# Altium PCB KSS.PcbDoc
Units mm, origin at the board's own origin, x right, y up, seen from the top; angles counter-clockwise.
Board outline 179 x 54.5 mm, 2 copper layers (Top Layer, Bottom Layer); 39 components, 44 nets, 172 pads, 1 vias.
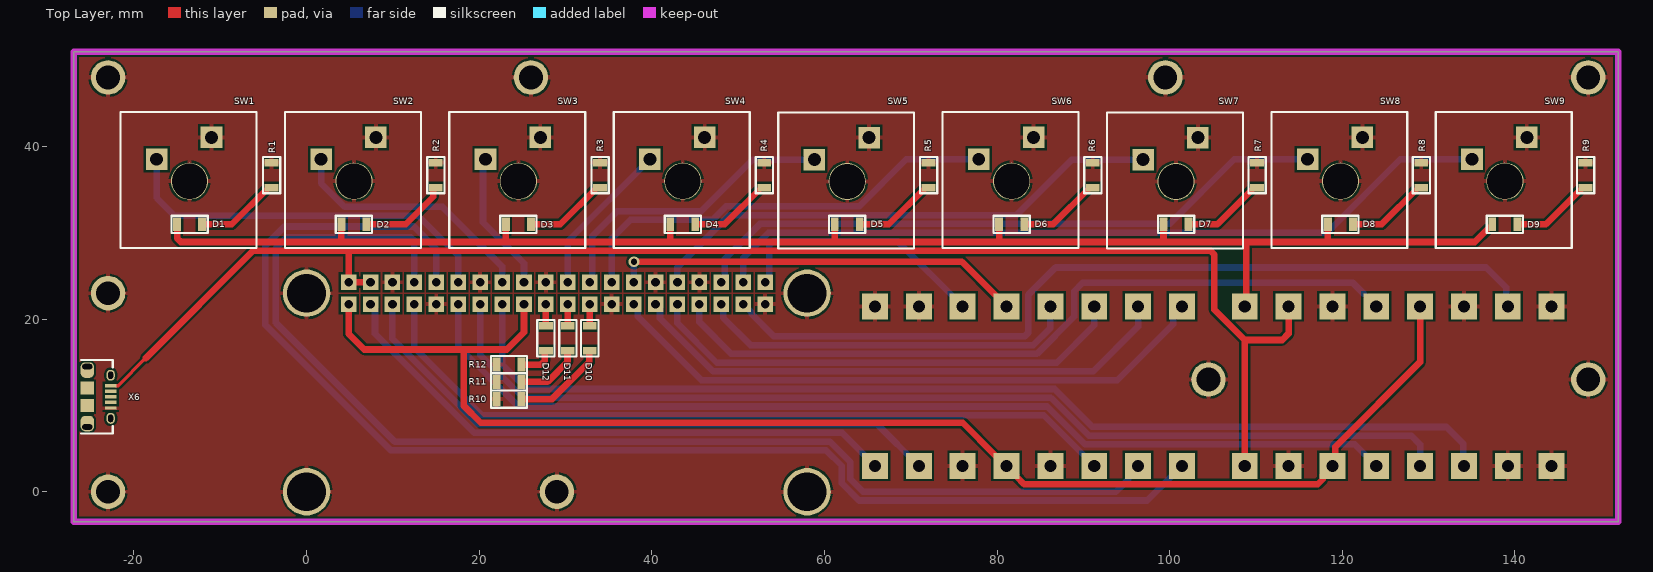
[diagram p0: Top Layer view]
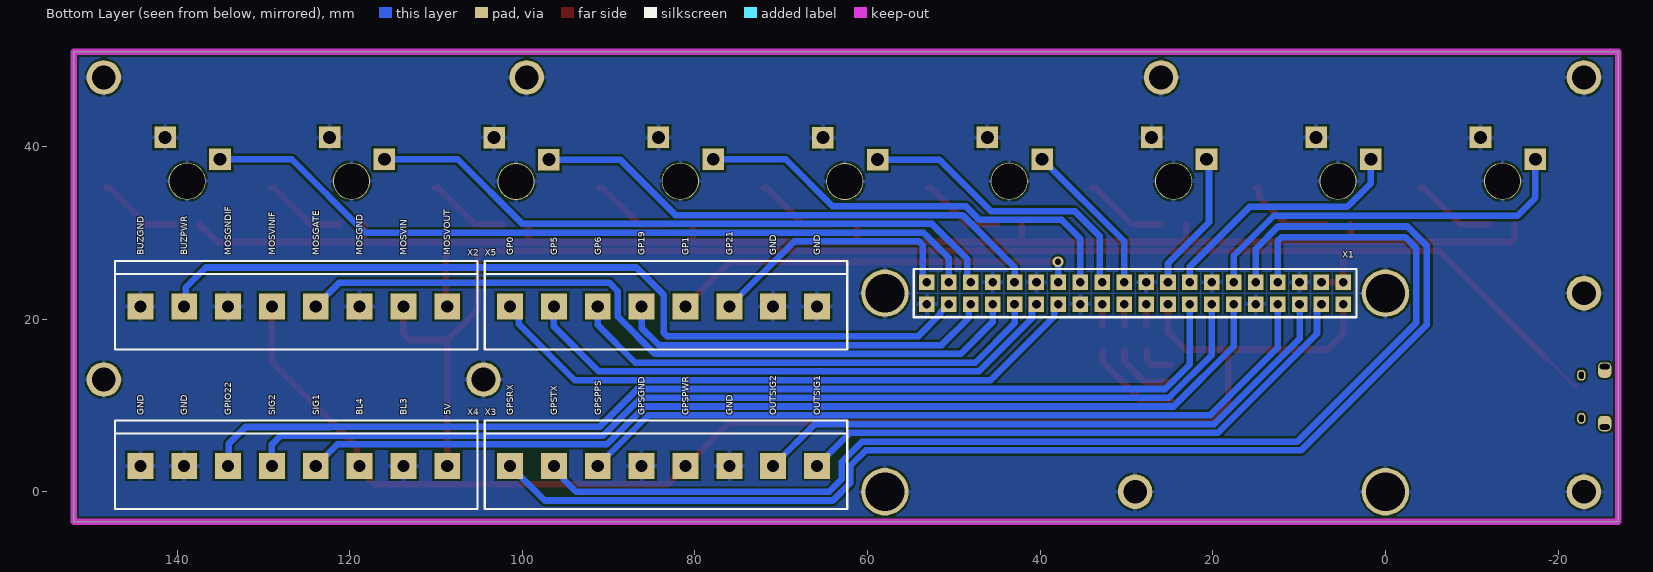
[diagram p1: Bottom Layer view, seen from below]
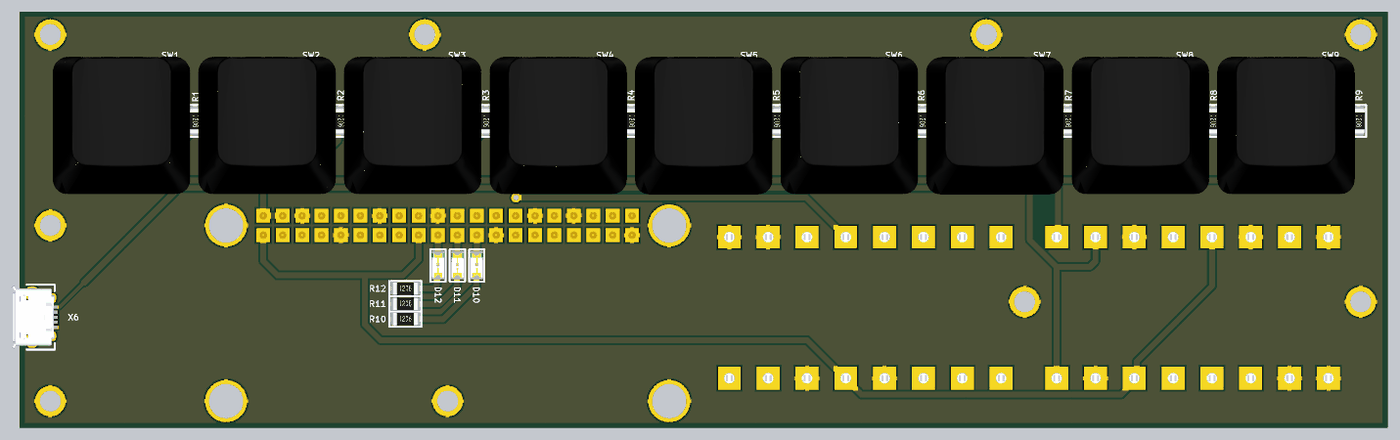
[diagram p2: 3D render of the assembled board from above, using the file's embedded part models]
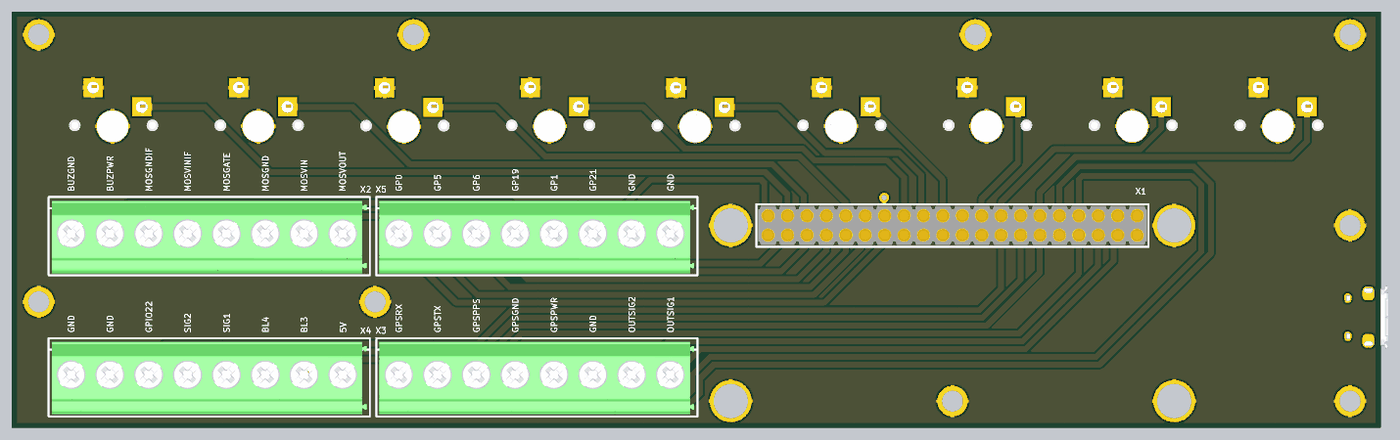
[diagram p3: 3D render of the assembled board from below, using the file's embedded part models]

## Layer stack, top to bottom
Top Solder: solder mask 0.0102, Solder Resist, Dk 3.5
Top Layer: signal copper 0.0356
Dielectric 1: dielectric 0.32, FR-4, Dk 4.8
Bottom Layer: signal copper 0.0356
Bottom Solder: solder mask 0.0102, Solder Resist, Dk 3.5

## Board outline
-27,-3.5 152,-3.5 152,51 -27,51

## Design rules (kind name [scope] priority, off if disabled: settings)
Clearance [All] p1: gap=0.254 ignorepadtopadclearanceinfootprint=FALSE except(0: Arc-Hole Track-Hole SMDPad-Hole THPad-Hole Via-Hole Fill-Hole Poly-Hole Region-Hole Text-Hole; 0.152: SMDPad-SMDPad)
ComponentClearance ComponentClearance_2 [All] p1: gap=0 collisioncheckmode=3 verticalgap=0 showdistances=FALSE
ComponentClearance ComponentClearance_1 [HasFootprint('Key switch Outemu') vs HasFootprint('LED_1206')] p2: gap=0 collisioncheckmode=3 verticalgap=0 showdistances=FALSE
ComponentClearance [All] p3: gap=0.254 collisioncheckmode=3 verticalgap=0.254 showdistances=FALSE
PlaneConnect [All] p1: planeconnectstyle=Relief reliefexpansion=0.508 reliefentries=4 reliefconductorwidth=0.508 reliefairgap=0.254
PolygonConnect [All] p1: connectstyle=Relief reliefconductorwidth=0.508 reliefentries=4 polygonreliefangle="90 Angle" airgapwidth=0.254
RoutingVias [All] p1: holewidth=0.711 width=1.27 viastyle="Through Hole" minholewidth=0.711 minwidth=1.27 maxholewidth=0.711 maxwidth=1.27
SolderMaskExpansion [All] p1: expansion=0.102 istentingtop=FALSE
Width [All] p1: maxlimit=0.762 minlimit=0.254 preferedwidth=0.254
28 further rules are at their usual default settings.

## Components (designator, comment, footprint, x,y, rotation, side; value= is the part's Value field where it differs from the comment)
D1 "?" LED_1206 -13.56,30.98 r0 top
D2 "?" LED_1206 5.49,30.98 r0 top
D3 "?" LED_1206 24.54,30.98 r0 top
D4 "?" LED_1206 43.59,30.98 r0 top
D5 "?" LED_1206 62.64,30.98 r0 top
D6 "?" LED_1206 81.69,30.98 r0 top
D7 "?" LED_1206 100.74,30.98 r0 top
D8 "?" LED_1206 119.79,30.98 r0 top
D9 "?" LED_1206 138.84,30.98 r0 top
D10 "RED" LED_1206_DLC 32.81,17.78 r270 top
D11 "YELLOW" LED_1206_DLC 30.27,17.78 r270 top
D12 "GREEN" LED_1206_DLC 27.73,17.78 r270 top
R1 "Resistor" "RES 1206" -4.06,36.68 r270 top
R2 "Resistor" "RES 1206" 14.971,36.68 r270 top
R3 "Resistor" "RES 1206" 34.002,36.68 r270 top
R4 "Resistor" "RES 1206" 53.034,36.68 r270 top
R5 "Resistor" "RES 1206" 72.065,36.68 r270 top
R6 "Resistor" "RES 1206" 91.096,36.68 r270 top
R7 "Resistor" "RES 1206" 110.127,36.68 r270 top
R8 "Resistor" "RES 1206" 129.159,36.68 r270 top
R9 "Resistor" "RES 1206" 148.19,36.68 r270 top
R10 "Resistor" "RES 1206" 23.45,10.73 r0 top
R11 "Resistor" "RES 1206" 23.45,12.73 r0 top
R12 "Resistor" "RES 1206" 23.45,14.73 r0 top
SW1 "Pushbutton" "Key switch Outemu" -13.56,35.98 r0 top
SW2 "Pushbutton" "Key switch Outemu" 5.49,35.98 r0 top
SW3 "Pushbutton" "Key switch Outemu" 24.54,35.98 r0 top
SW4 "Pushbutton" "Key switch Outemu" 43.59,35.98 r0 top
SW5 "Pushbutton" "Key switch Outemu" 62.64,35.94 r0 top
SW6 "Pushbutton" "Key switch Outemu" 81.69,35.98 r0 top
SW7 "Pushbutton" "Key switch Outemu" 100.74,35.94 r0 top
SW8 "Pushbutton" "Key switch Outemu" 119.79,35.98 r0 top
SW9 "Pushbutton" "Key switch Outemu" 138.84,35.98 r0 top
X1 "GoldPin_F_20x2" GOLDPIN_F_20x2 4.87,24.27 r0 bottom
X2 "?" "SCREW_TERMINAL_X8 5,08mm" 108.7,21.48 r0 bottom
X3 "?" "SCREW_TERMINAL_X8 5,08mm" 65.86,3 r0 bottom
X4 "?" "SCREW_TERMINAL_X8 5,08mm" 108.7,3 r0 bottom
X5 "?" "SCREW_TERMINAL_X8 5,08mm" 65.86,21.48 r0 bottom
X6 "USB_MICRO_B" USB_MICRO_B_MX-105017-0001 -22.7,11 r270 top

## Footprints (in the part's own frame and the unit in brackets; to place one, negate y for a bottom-side part, rotate by r counter-clockwise, add the part's x,y. Pads: shape width x height; smd on the part's side, far side on the other; paste and mask are expansions set on the pad)
GOLDPIN_F_20x2 [mm]
  rect 1.8x1.8 hole 1: 1(0,0) 2(0,2.54) 3(2.54,0) 4(2.54,2.54) 5(5.08,0) 6(5.08,2.54) 7(7.62,0) 8(7.62,2.54) 9(10.16,0) 10(10.16,2.54) 11(12.7,0) 12(12.7,2.54) 13(15.24,0) 14(15.24,2.54) 15(17.78,0) 16(17.78,2.54) 17(20.32,0) 18(20.32,2.54) 19(22.86,0) 20(22.86,2.54) 21(25.4,0) 22(25.4,2.54) 23(27.94,0) 24(27.94,2.54) 25(30.48,0) 26(30.48,2.54) 27(33.02,0) 28(33.02,2.54) 29(35.56,0) 30(35.56,2.54) 31(38.1,0) 32(38.1,2.54) 33(40.64,0) 34(40.64,2.54) 35(43.18,0) 36(43.18,2.54) 37(45.72,0) 38(45.72,2.54) 39(48.26,0) 40(48.26,2.54)
  silkscreen extent -1.52,-1.52 49.78,4.06, body extent -1.29,-1.28 49.51,3.8, height 7.1
"Key switch Outemu" [mm]
  rect 2.5x2.5 hole 1.5: 1(-3.81,2.54) 2(2.54,5.08)
  round 4.3 hole 4.1: MH(0,0)
  silkscreen extent -8,-7.75 7.75,8, body extent -9.13,-8.87 8.87,9.13, height 19.43
LED_1206 [mm]
  rect 0.9x1.6 smd: 1(-1.45,0) 2(1.45,0)
  silkscreen extent -2.1,-1 2.1,1, body extent -1.6,-0.8 1.6,0.8, height 0.62
LED_1206_DLC [mm]
  rect 0.9x1.6 smd: 1(-1.45,0) 2(1.45,0)
  silkscreen extent -2.1,-1 2.1,1, body extent -1.6,-0.8 1.6,0.8, height 1.8
"RES 1206" [mm]
  rect 0.9x1.6 smd: 1(-1.45,0) 2(1.45,0)
  silkscreen extent -2.1,-1 2.1,1, body extent -1.6,-0.8 1.6,0.8, height 0.58
"SCREW_TERMINAL_X8 5,08mm" [mm] "RASTER 5 mm"
  rect 3x3 hole 1.4: 1(0,0) 2(5.08,0) 3(10.16,0) 4(15.24,0) 5(20.32,0) 6(25.4,0) 7(30.48,0) 8(35.56,0)
  silkscreen extent -3.5,-5.25 38.5,5, body extent -3.1,-4.75 38.11,4.75, height 15.1
USB_MICRO_B_MX-105017-0001 [mm]
  rect 0.4x1.35 smd: 1(-1.3,0) 2(-0.65,0) 3(0,0) 4(0.65,0) 5(1.3,0)
  rrect70% 1.8x1.55 hole 0.6 slot 1.15 at 90 deg copper offset 0.4,0: MH(-3.5,-2.7)
  rrect90% 1.25x0.95 hole 0.55 slot 0.85 at 0 deg: MH(-2.5,0) MH(2.5,0)
  rrect70% 1.8x1.55 hole 0.6 slot 1.15 at 90 deg copper offset -0.4,0: MH(3.5,-2.7)
  rect 1.5x1.55 smd: MP(-1,-2.7) MP(1,-2.7)
  silkscreen extent -4.25,-3.4 4.25,0.25, body extent -4.1,-5.28 4.1,0.15, height 2.68

## Part data
D1 D2 D3 D4 D5 D6 D7 D8 D9 D10 D11 D12: library part "Diode LED"
R1 R2 R3 R4 R5 R6 R7 R8 R9 R12: Resistance=10
R10 R11: Resistance=56
X2 X3 X4 X5: library part "Connector x8"

## Free pads (board coordinates)
  round 4 hole 2.75: MH(-23,0) MH(-23,23) MH(-23,48) MH(26,48) MH(29,0) MH(99.5,48) MH(99.5,48) MH(104.5,13) MH(148.5,48) MH(148.5,13)
  round 5.5 hole 4.5: MH(0,0) MH(0,23) MH(58,0) MH(58,23)

## Via types
v1: diameter 1.27, hole 0.711, Top Layer to Bottom Layer, 1 vias

## Nets (pads, with @x,y where several pads share a name; then routed paths per layer and width w, separated by ;. In a path a pad name is that pad's centre, name@x,y a point inside that pad or via, vN(x,y) a via of type N, cw(c..) or ccw(c..) an arc to the next point about the centre after c; other vN are vias at no path point)
5V: X1.1 X1.3 X2.2 X4.1 X6.1 | length 174.6
  Top Layer w0.381: X6.1@-22.116,12.294 -21.821,12.294 -18.62,15.495
  Top Layer w0.762: -18.62,15.495 -6.202,27.914 4.87,27.914 ; X1.3 X1.1 4.87,27.914 ; X4.1 108.7,17.582 ; X2.2 113.78,18.32 113.042,17.582 108.7,17.582 ; 4.87,27.914 104.744,27.914 105.19,27.468 105.19,21.092 108.7,17.582
BUTTON_LED_3: pad.MH R1.1 R2.1 R3.1 R4.1 R5.1 R6.1 R7.1 R8.1 R9.1 R10.1 R11.1 R12.1 SW1.2 SW1.MH SW2.2 SW2.MH SW3.2 SW3.MH SW4.2 SW4.MH SW5.2 SW5.MH SW6.2 SW6.MH SW7.2 SW7.MH SW8.2 SW8.MH SW9.2 SW9.MH X1.5 X1.10 X1.13 X1.19 X1.26 X1.29 X1.33 X1.40 X2.3 X2.6 X2.8 X3.3 X3.5 X4.2 X4.7 X4.8 X5.1 X5.2 X6.5
BUTTON_LED_4: X1.2 X1.18 X2.5 X3.4 X4.3 | length 163.5
  Top Layer w0.762: X1.2 4.87,18.3 6.69,16.48 18.19,16.48 ; X1.18 25.19,18.48 23.19,16.48 18.19,16.48 ; X2.5 129.02,15.02 119.197,5.197 119.197,3.337 117.741,1.881 117.741,1.446 117.16,0.865 83.135,0.865 82.219,1.781 82.219,1.881 81.15,2.95 81.05,2.95 81.05,3.05 79.981,4.119 79.881,4.119 76.02,7.98 20.19,7.98 18.19,9.98 18.19,16.48
"BUZZER V+": X1.38 X2.7 | length 99.1
  Bottom Layer w0.762: X1.38 51.595,20.725 51.595,20.567 54.162,18 83.194,18 83.64,18.446 83.64,22.838 86.782,25.98 136.69,25.98 138.993,23.677 138.993,21.667 X2.7
GPIO0: X1.28 X5.8 | length 71.9
  Bottom Layer w0.762: X1.28 38.361,21.259 38.361,20.309 45.75,12.92 93.92,12.92 100.404,19.404 100.404,20.464 X5.8
GPIO1: X1.27 X5.4 | length 47.7
  Top Layer w0.762: v1(37.94,26.644) 75.936,26.644 X5.4
  Bottom Layer w0.762: X1.27 37.915,24.295 37.915,26.619 v1(37.94,26.644)
GPIO2: X1.4 X3.1 | length 67.9
  Bottom Layer w0.762: X1.4 7.929,21.211 7.929,18.304 19.409,6.824 62.036,6.824 X3.1
GPIO3: X1.6 X3.2 | length 71.1
  Bottom Layer w0.762: X1.6 9.95,17.72 19.83,7.84 66.1,7.84 X3.2
GPIO4: X1.8 X3.6 | length 89.5
  Bottom Layer w0.762: X1.8 12.49,16.68 20.314,8.856 85.404,8.856 X3.6
GPIO5: X1.30 X5.7 | length 64.3
  Bottom Layer w0.762: X1.30 40.949,21.211 40.949,20.1 47.113,13.936 91.146,13.936 96.34,19.13 X5.7
GPIO6: X1.32 X5.6 | length 56.4
  Bottom Layer w0.762: X1.32 42.97,19.516 47.534,14.952 86.912,14.952 91.243,19.283 91.243,21.463 X5.6
GPIO7: SW6.1 X1.25 | length 51.4
  Bottom Layer w0.762: X1.25 35.35,29.35 37.5,31.5 47.023,31.5 48.587,33.064 64.024,33.064 69.48,38.52 SW6.1
GPIO8: SW5.1 X1.23 | length 34.9
  Bottom Layer w0.762: X1.23 33.077,24.537 33.077,29.577 36.016,32.516 45.726,32.516 51.69,38.48 SW5.1
GPIO9: D11.1 X1.22 | length 2.5
  Top Layer w0.762: D11.1 X1.22
GPIO10: D12.1 X1.20 | length 2.5
  Top Layer w0.762: D12.1 X1.20
GPIO11: D10.1 X1.24 | length 2.5
  Top Layer w0.762: D10.1 X1.24
GPIO12: SW7.1 X1.31 | length 60.9
  Bottom Layer w0.762: X1.31 42.97,26.01 49.008,32.048 82.258,32.048 88.69,38.48 SW7.1
GPIO13: X1.34 X2.4 | length 88.3
  Bottom Layer w0.762: X1.34 45.51,19.66 49.202,15.968 84.615,15.968 88.94,20.293 88.94,23.23 89.94,24.23 121.19,24.23 X2.4
GPIO14: X1.7 X3.7 | length 140.8
  Bottom Layer w0.762: X1.7 12.49,29.034 12.044,29.48 -2.31,29.48 -3.56,28.23 -3.56,19.56 10.192,5.808 60.629,5.808 63.016,3.421 63.016,1.446 64.462,0 93.775,0 95.221,1.446 95.221,1.881 X3.7
GPIO15: X1.9 X3.8 | length 152.3
  Bottom Layer w0.762: X1.9 15.03,28.14 12.44,30.73 -2.56,30.73 -4.81,28.48 -4.81,19.373 9.771,4.792 60.208,4.792 62,3 62,1 64.016,-1.016 97.404,-1.016 X3.8
GPIO16: SW8.1 X1.35 | length 75.2
  Bottom Layer w0.762: X1.35 48.461,24.681 48.461,26.961 52.532,31.032 99.992,31.032 107.48,38.52 SW8.1
GPIO17: X1.12 X4.4 | length 117
  Bottom Layer w0.762: X1.12 17.57,16.85 24.548,9.872 85.825,9.872 90.213,5.484 121.456,5.484 X4.4
GPIO18: SW1.1 X1.11 | length 45.3
  Bottom Layer w0.762: SW1.1 -17.37,34.04 -15.31,31.98 12.94,31.98 17.57,27.35 X1.11
GPIO19: X1.36 X5.5 | length 44.2
  Bottom Layer w0.762: X1.36 48.287,21.493 48.287,20.133 51.436,16.984 84.194,16.984 86.18,18.97 X5.5
GPIO20: SW9.1 X1.37 | length 92
  Bottom Layer w0.762: X1.37 50.59,27.09 53.516,30.016 118.226,30.016 126.73,38.52 SW9.1
GPIO21: X1.39 X5.3 | length 30.2
  Bottom Layer w0.762: X1.39 53.604,24.744 53.604,28.554 54.05,29 68.5,29 X5.3
GPIO22: X1.16 X4.6 | length 124.7
  Bottom Layer w0.762: X1.16 22.65,14.77 25.516,11.904 86.667,11.904 91.055,7.516 122.298,7.516 122.314,7.5 132.08,7.5 134,5.58 134,3.1 X4.6
GPIO23: SW2.1 X1.15 | length 29.6
  Bottom Layer w0.762: SW2.1 1.68,35.74 4.424,32.996 15.746,32.996 22.65,26.092 X1.15
GPIO24: SW3.1 X1.17 | length 16.3
  Bottom Layer w0.762: SW3.1 20.44,38.23 20.44,31.23 25.19,26.48 X1.17
GPIO25: SW4.1 X1.21 | length 18.2
  Bottom Layer w0.762: X1.21 30.27,29.01 SW4.1
GPIO27: X1.14 X4.5 | length 121.6
  Bottom Layer w0.762: X1.14 20.11,15.873 25.095,10.888 86.246,10.888 90.634,6.5 121.877,6.5 121.893,6.484 128.016,6.484 129.02,5.48 X4.5
KEYS_LED: D1.1 D2.1 D3.1 D4.1 D5.1 D6.1 D7.1 D8.1 D9.1 X2.1 | length 177.4
  Top Layer w0.762: D1.1 -15.01,29.376 -14.564,28.93 3.94,28.93 ; D2.1 4.04,29.03 3.94,28.93 ; D3.1 23.09,29.03 23.19,28.93 ; D4.1 42.14,29.13 41.94,28.93 ; D5.1 61.19,28.93 ; D6.1 80.24,28.98 80.19,28.93 ; D7.1 99.29,28.955 99.315,28.93 ; X2.1 108.877,21.657 108.877,28.93 ; D8.1 118.34,29.03 118.44,28.93 ; D9.1 137.39,30.63 137.321,30.561 136.971,30.561 135.34,28.93 118.44,28.93 ; 3.94,28.93 23.19,28.93 ; 23.19,28.93 41.94,28.93 ; 41.94,28.93 61.19,28.93 ; 61.19,28.93 80.19,28.93 ; 80.19,28.93 99.315,28.93 ; 99.315,28.93 108.877,28.93 ; 108.877,28.93 118.44,28.93
NetD1_2: D1.2 R1.2 | length 9.8
  Top Layer w0.762: D1.2 -8.66,30.98 -4.41,35.23 R1.2
NetD2_2: D2.2 R2.2 | length 10.4
  Top Layer w0.762: D2.2 11.48,30.98 14.679,34.179 14.679,35.161 14.748,35.23 R2.2
NetD3_2: D3.2 R3.2 | length 9.8
  Top Layer w0.762: D3.2 29.402,30.98 33.652,35.23 R3.2
NetD4_2: D4.2 R4.2 | length 9.8
  Top Layer w0.762: D4.2 48.434,30.98 52.684,35.23 R4.2
NetD5_2: D5.2 R5.2 | length 9.7
  Top Layer w0.762: D5.2 67.465,30.98 71.715,35.23 R5.2
NetD6_2: D6.2 R6.2 | length 9.7
  Top Layer w0.762: D6.2 86.496,30.98 90.746,35.23 R6.2
NetD7_2: D7.2 R7.2 | length 9.7
  Top Layer w0.762: D7.2 105.527,30.98 109.777,35.23 R7.2
NetD8_2: D8.2 R8.2 | length 9.7
  Top Layer w0.762: D8.2 124.559,30.98 128.809,35.23 R8.2
NetD9_2: D9.2 R9.2 | length 9.7
  Top Layer w0.762: D9.2 143.59,30.98 147.84,35.23 R9.2
NetD10_2: D10.2 R10.2 | length 10.9
  Top Layer w0.762: R10.2 28.44,10.73 32.77,15.06 D10.2@32.77,16.33
NetD11_2: D11.2 R11.2 | length 7.6
  Top Layer w0.762: R11.2 27.9,12.73 30.23,15.06 D11.2@30.23,16.33
NetD12_2: D12.2 R12.2 | length 4.1
  Top Layer w0.762: R12.2 27.15,14.73 27.596,15.176 27.596,16.261 27.665,16.33 D12.2@27.69,16.33
pads on no net: X6.2 X6.3 X6.4 X6.MH X6.MP

## Polygon pours and split planes (outlines as drawn)
BUTTON_LED_3 on Bottom Layer "GND" (solid, remove dead copper, pour order 0): -27,51 -27,-3.5 152,-3.5 152,51
BUTTON_LED_3 on Top Layer "GND" (solid, remove dead copper, pour order 1): -27,51 -27,-3.5 152,-3.5 152,51

## Keep-outs
Keep-Out Layer:
  the board outline again, w0.762

## Silkscreen, mask and mechanical layers (free items; w line width, h text height)
Bottom Overlay:
  text "GND" at 65.479,27.377 h0.76 r270
  text "GND" at 70.559,27.377 h0.76 r270
  text "GP21" at 75.639,27.377 h0.76 r270
  text "GP1" at 80.719,27.377 h0.76 r270
  text "GP19" at 85.799,27.377 h0.76 r270
  text "GP6" at 90.879,27.377 h0.76 r270
  text "GP5" at 95.959,27.377 h0.76 r270
  text "GP0" at 101.039,27.377 h0.76 r270
  text "MOSVOUT" at 108.377,27.377 h0.76 r270
  text "MOSVIN" at 113.399,27.377 h0.76 r270
  text "MOSGND" at 118.479,27.377 h0.76 r270
  text "MOSGATE" at 123.559,27.377 h0.76 r270
  text "MOSVINIF" at 128.639,27.377 h0.76 r270
  text "MOSGNDIF" at 133.719,27.377 h0.76 r270
  text "BUZPWR" at 138.799,27.377 h0.76 r270
  text "BUZGND" at 143.879,27.377 h0.76 r270
  text "OUTSIG1" at 65.479,8.877 h0.76 r270
  text "OUTSIG2" at 70.559,8.877 h0.76 r270
  text "GND" at 75.639,8.877 h0.76 r270
  text "GPSPWR" at 80.719,8.877 h0.76 r270
  text "GPSGND" at 85.799,8.877 h0.76 r270
  text "GPSPPS" at 90.879,8.877 h0.76 r270
  text "GPSTX" at 95.959,8.877 h0.76 r270
  text "GPSRX" at 101.039,8.877 h0.76 r270
  text "5V" at 108.319,8.877 h0.76 r270
  text "BL3" at 113.399,8.877 h0.76 r270
  text "BL4" at 118.479,8.877 h0.76 r270
  text "SIG1" at 123.559,8.877 h0.76 r270
  text "SIG2" at 128.639,8.877 h0.76 r270
  text "GPIO22" at 133.719,8.877 h0.76 r270
  text "GND" at 138.799,8.877 h0.76 r270
  text "GND" at 143.879,8.877 h0.76 r270